# EAGLE board marionette_v1.0 (EAGLE 7.1.0), part 1 of 3
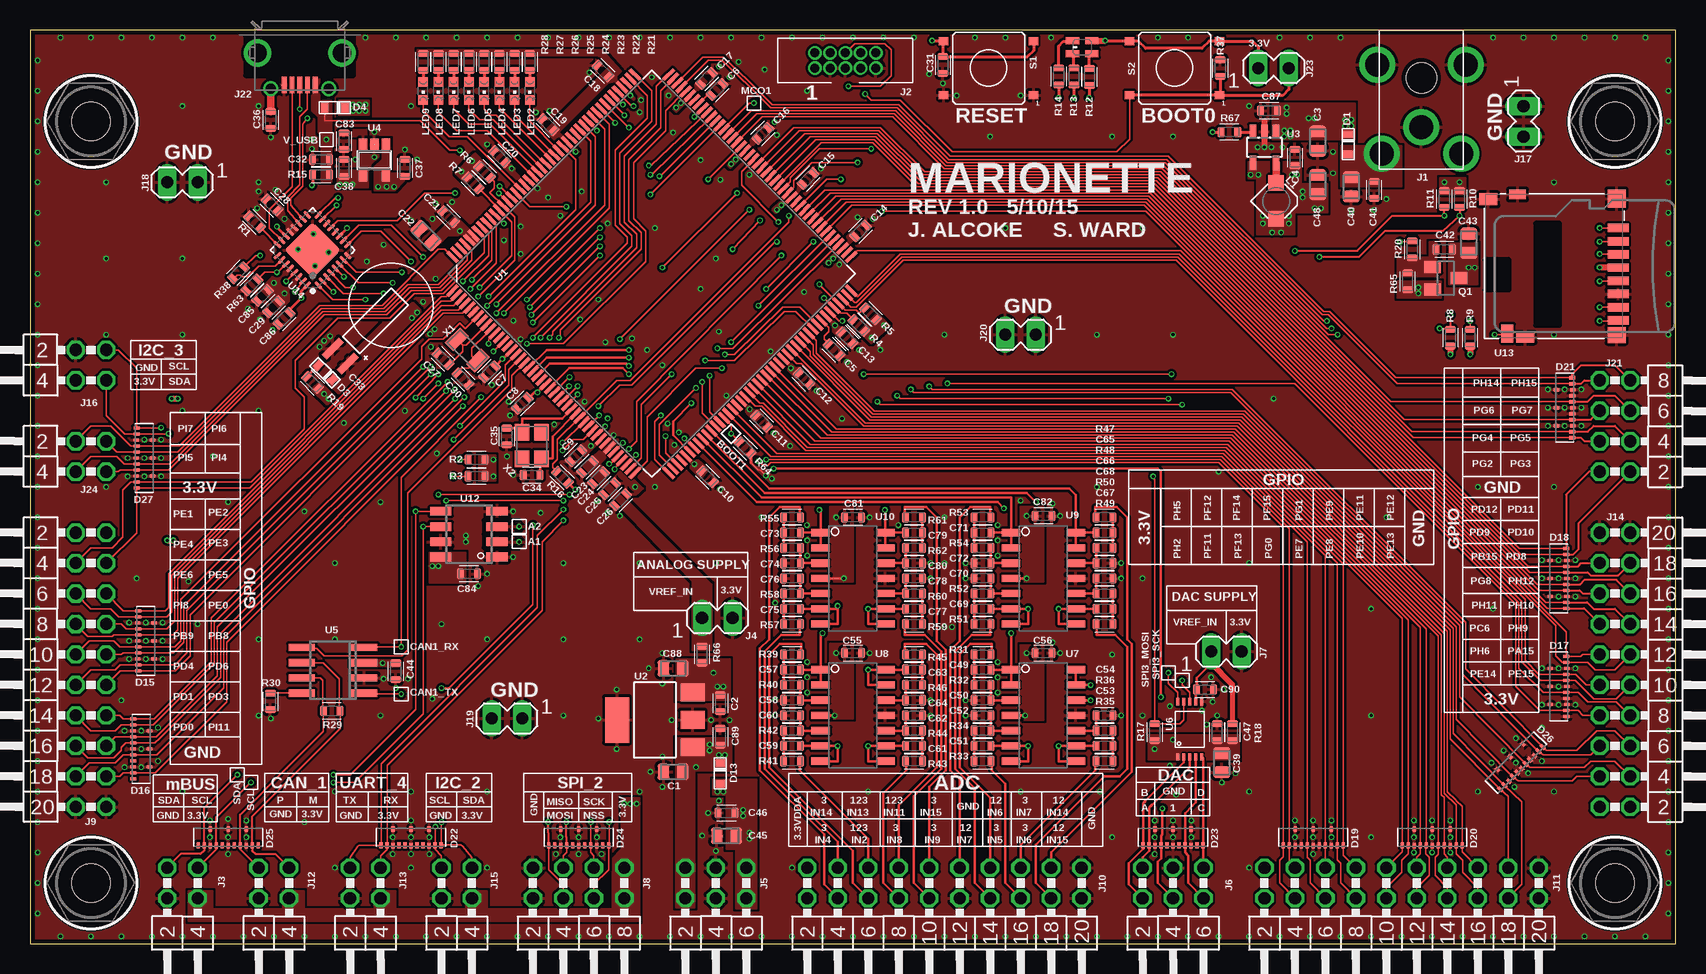
[diagram p0: board, top side]
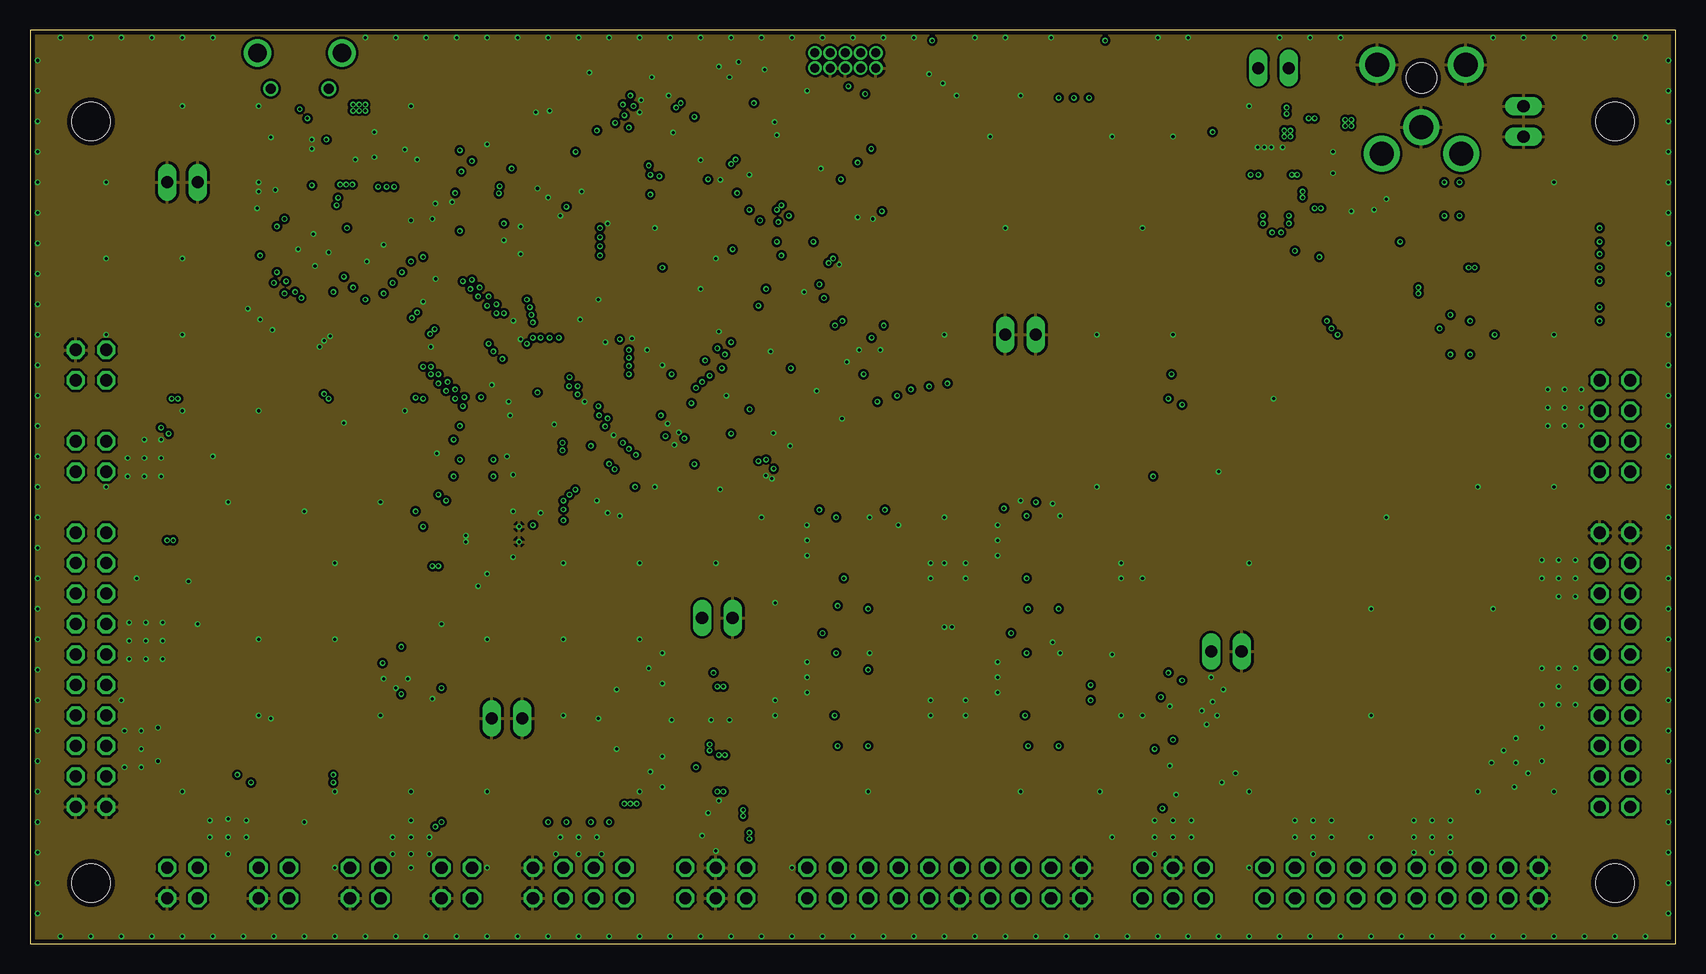
[diagram p1: board, inner layer Route2]
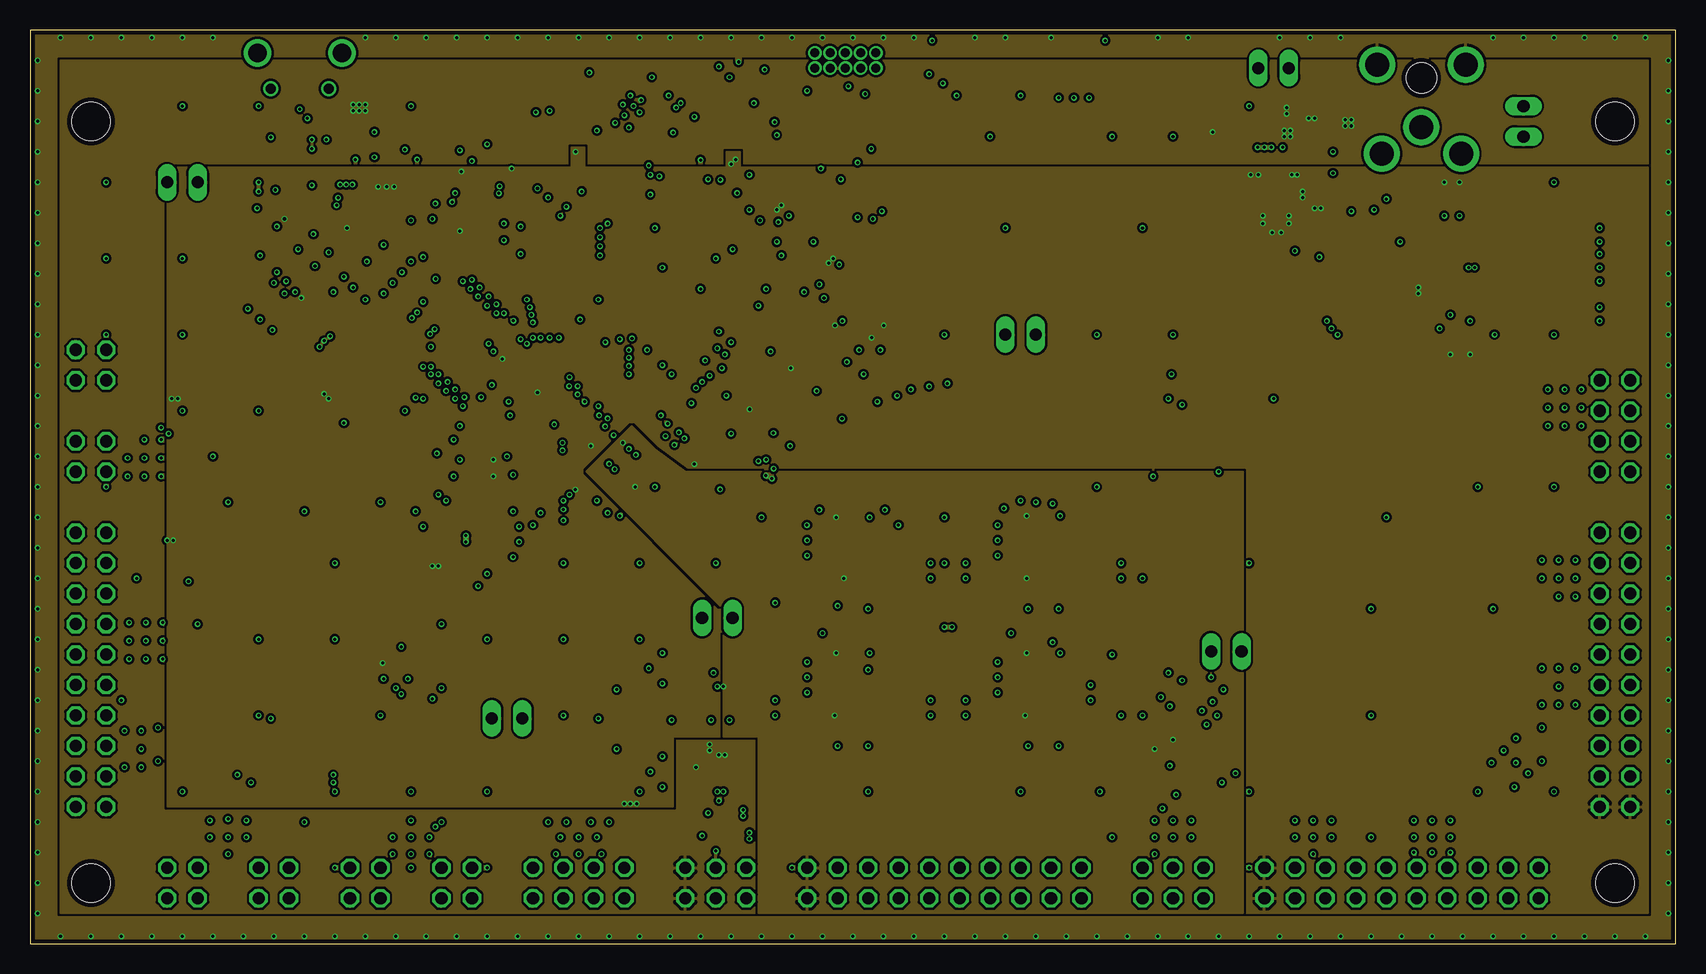
[diagram p2: board, inner layer Route15]
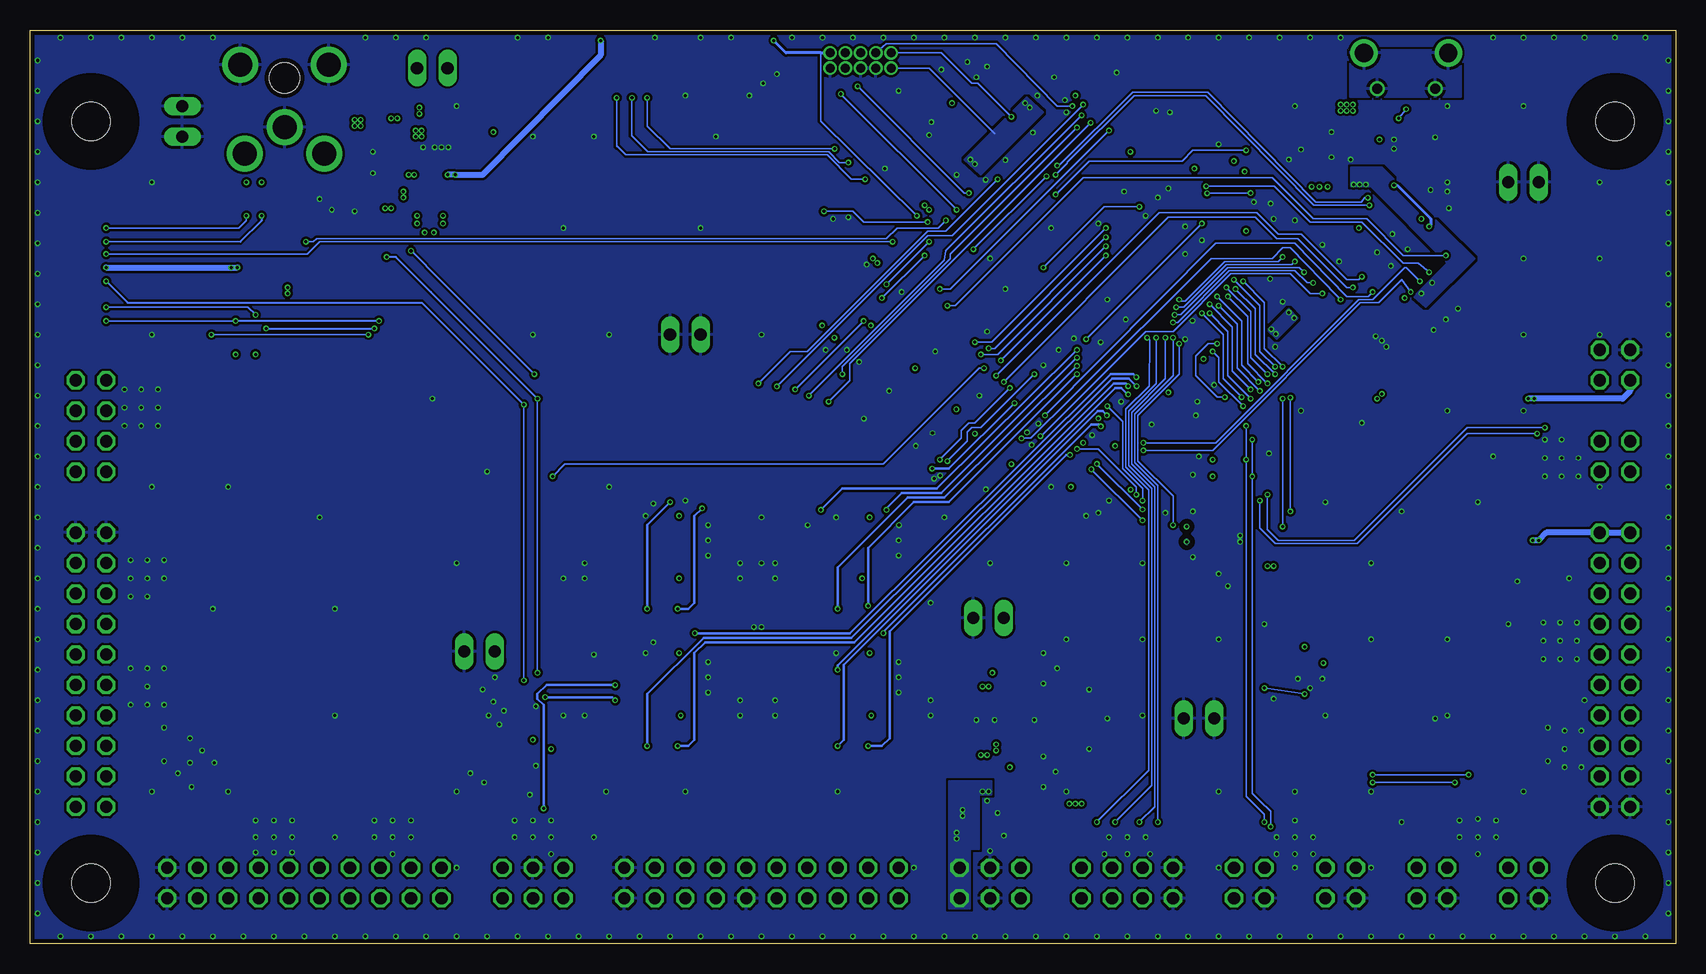
[diagram p3: board, bottom side, seen from below]

Size 137.16 x 76.2 mm. Coordinates in mm from the lower left corner, seen from the top.
Outline: 137.16,0 137.16,76.2 0,76.2 0,0 137.16,0
Copper layers (1*2*15*16): Top 0.035559375mm / dielectric 0.17018125mm / Route2 0.01778125mm / dielectric 47mil / Route15 0.01778125mm / dielectric 0.17018125mm / Bottom 0.035559375mm
Design rules "OSHPark-4layer": minimum track width 5mil, minimum drill 10mil, track to track 5mil, track to pad 5mil, pad to pad 5mil, via to via 5mil, smd to smd 5mil, copper to edge 15mil, drill to drill 6mil, minimum pad ring 4mil, minimum via ring 4mil, stop-mask expansion 4mil, vias tented up to drill 0mil, thermal gap 10mil
tRestrict: 6 lines
bRestrict: area 40.4,34.4 to 41.2,35.2; area 40.3,33.1 to 41.2,34

## Footprints (pad centres in the part's own frame; a part is rotated, then mirrored left to right if it is on the bottom)
10MIL-TEST-POINT = drill 0.254: P$1 0,0
.0805-C-NOSILK = smd 0.95 x 1.35: 1 -0.8,0; 2 0.8,0
.0603-C = smd 0.6 x 0.9: 1 -0.7,0; 2 0.7,0
SCAP = smd 0.6 x 2: N -0.9,0; P 0.9,0
SOD-523F = smd 0.6 x 0.8: P$1 -0.85,0; P$2 0.85,0
UFDFN-14 = smd 0.26 x 0.43: GND@1 -1.5,-0.685; GND@2 0,-0.685; GND@3 1.5,-0.685; GND@4 -1.5,0.685; GND@5 0,0.685; GND@6 1.5,0.685 | smd 0.26 x 0.5: P1 -2.5,-0.65; P2 -2,-0.65; P3 -1,-0.65; P4 -0.5,-0.65; P5 0.5,-0.65; P6 1,-0.65; P7 2,-0.65; P8 2.5,-0.65
MALE_JACK = drill 2 pad 2.54: 1 10.3,-3.3; 2 8.1,0; 3 10.3,3.3; P$1 2.9,3.7; P$2 2.9,-3.7 | hole 2.5: 4,0
2X10_BOXHEADER = drill 0.75 pad 0.813: 1 -2.54,-0.635; 2 -2.54,0.635; 3 -1.27,-0.635; 4 -1.27,0.635; 5 0,-0.635; 6 0,0.625; 7 1.27,-0.635; 8 1.27,0.635; 9 2.54,-0.635; 10 2.54,0.635
MA02-2W = drill 1.016 octagon: 1 -1.27,-1.27; 2 -1.27,1.27; 3 1.27,-1.27; 4 1.27,1.27
MA02-1 = drill 1.016 long: 1 -1.27,0; 2 1.27,0
MA03-2W = drill 1.016 octagon: 1 -2.54,-1.27; 2 -2.54,1.27; 3 0,-1.27; 4 0,1.27; 5 2.54,-1.27; 6 2.54,1.27
MA04-2W = drill 1.016 octagon: 1 -3.81,-1.27; 2 -3.81,1.27; 3 -1.27,-1.27; 4 -1.27,1.27; 5 1.27,-1.27; 6 1.27,1.27; 7 3.81,-1.27; 8 3.81,1.27
MA10-2W = drill 1.016 octagon: 1 -11.43,-1.27; 2 -11.43,1.27; 3 -8.89,-1.27; 4 -8.89,1.27; 5 -6.35,-1.27; 6 -6.35,1.27; 7 -3.81,-1.27; 8 -3.81,1.27; 9 -1.27,-1.27; 10 -1.27,1.27; 11 1.27,-1.27; 12 1.27,1.27; 13 3.81,-1.27; 14 3.81,1.27; 15 6.35,-1.27; 16 6.35,1.27; 17 8.89,-1.27; 18 8.89,1.27; 19 11.43,-1.27; 20 11.43,1.27
ZX62D-B-5P8 = smd 0.4 x 1.35: P1 -1.3,2.675; P2 -0.65,2.675; P3 0,2.675; P4 0.65,2.675; P5 1.3,2.675 | drill 1.524: P$1 3.51,0; P$2 -3.51,0 | drill 0.838: P$3 -2.425,3; P$4 2.425,3
CDRH2D14 = smd 1.3 x 1.3 rotated 45: 1 -1.06,1.06; 2 1.06,-1.06
KINGBRITE_RGBLED_1.6X1.26 = smd 1.1 x 0.6: 1 0.8,-0.55; 2 -0.8,-0.55; 3 -0.8,0.55; 4 0.8,0.55
CHIPLED_0603 = smd 0.8 x 0.8: A 0,-0.75; C 0,0.75
SOT23 = smd 1 x 1.4: 1 -0.95,-1.1; 2 0.95,-1.1; 3 0,1.1
SMT = smd 0.775 x 0.65: 1 -3.75,2.25; 2 3.75,2.25; 3 -3.75,-2.25; 4 3.75,-2.25
LQFP176 = smd 1.2 x 0.3: 1 -12.75,10.75; 2 -12.75,10.25; 3 -12.75,9.75; 4 -12.75,9.25; 5 -12.75,8.75; 6 -12.75,8.25; 7 -12.75,7.75; 8 -12.75,7.25; 9 -12.75,6.75; 10 -12.75,6.25; 11 -12.75,5.75; 12 -12.75,5.25; 13 -12.75,4.75; 14 -12.75,4.25; 15 -12.75,3.75; 16 -12.75,3.25; 17 -12.75,2.75; 18 -12.75,2.25; 19 -12.75,1.75; 20 -12.75,1.25; 21 -12.75,0.75; 22 -12.75,0.25; 23 -12.75,-0.25; 24 -12.75,-0.75; 25 -12.75,-1.25; 26 -12.75,-1.75; 27 -12.75,-2.25; 28 -12.75,-2.75; 29 -12.75,-3.25; 30 -12.75,-3.75; 31 -12.75,-4.25; 32 -12.75,-4.75; 33 -12.75,-5.25; 34 -12.75,-5.75; 35 -12.75,-6.25; 36 -12.75,-6.75; 37 -12.75,-7.25; 38 -12.75,-7.75; 39 -12.75,-8.25; 40 -12.75,-8.75; 41 -12.75,-9.25; 42 -12.75,-9.75; 43 -12.75,-10.25; 44 -12.75,-10.75; 89 12.75,-10.75; 90 12.75,-10.25; 91 12.75,-9.75; 92 12.75,-9.25; 93 12.75,-8.75; 94 12.75,-8.25; 95 12.75,-7.75; 96 12.75,-7.25; 97 12.75,-6.75; 98 12.75,-6.25; 99 12.75,-5.75; 100 12.75,-5.25; 101 12.75,-4.75; 102 12.75,-4.25; 103 12.75,-3.75; 104 12.75,-3.25; 105 12.75,-2.75; 106 12.75,-2.25; 107 12.75,-1.75; 108 12.75,-1.25; 109 12.75,-0.75; 110 12.75,-0.25; 111 12.75,0.25; 112 12.75,0.75; 113 12.75,1.25; 114 12.75,1.75; 115 12.75,2.25; 116 12.75,2.75; 117 12.75,3.25; 118 12.75,3.75; 119 12.75,4.25; 120 12.75,4.75; 121 12.75,5.25; 122 12.75,5.75; 123 12.75,6.25; 124 12.75,6.75; 125 12.75,7.25; 126 12.75,7.75; 127 12.75,8.25; 128 12.75,8.75; 129 12.75,9.25; 130 12.75,9.75; 131 12.75,10.25; 132 12.75,10.75 | smd 0.3 x 1.2: 45 -10.75,-12.75; 46 -10.25,-12.75; 47 -9.75,-12.75; 48 -9.25,-12.75; 49 -8.75,-12.75; 50 -8.25,-12.75; 51 -7.75,-12.75; 52 -7.25,-12.75; 53 -6.75,-12.75; 54 -6.25,-12.75; 55 -5.75,-12.75; 56 -5.25,-12.75; 57 -4.75,-12.75; 58 -4.25,-12.75; 59 -3.75,-12.75; 60 -3.25,-12.75; 61 -2.75,-12.75; 62 -2.25,-12.75; 63 -1.75,-12.75; 64 -1.25,-12.75; 65 -0.75,-12.75; 66 -0.25,-12.75; 67 0.25,-12.75; 68 0.75,-12.75; 69 1.25,-12.75; 70 1.75,-12.75; 71 2.25,-12.75; 72 2.75,-12.75; 73 3.25,-12.75; 74 3.75,-12.75; 75 4.25,-12.75; 76 4.75,-12.75; 77 5.25,-12.75; 78 5.75,-12.75; 79 6.25,-12.75; 80 6.75,-12.75; 81 7.25,-12.75; 82 7.75,-12.75; 83 8.25,-12.75; 84 8.75,-12.75; 85 9.25,-12.75; 86 9.75,-12.75; 87 10.25,-12.75; 88 10.75,-12.75; 133 10.75,12.75; 134 10.25,12.75; 135 9.75,12.75; 136 9.25,12.75; 137 8.75,12.75; 138 8.25,12.75; 139 7.75,12.75; 140 7.25,12.75; 141 6.75,12.75; 142 6.25,12.75; 143 5.75,12.75; 144 5.25,12.75; 145 4.75,12.75; 146 4.25,12.75; 147 3.75,12.75; 148 3.25,12.75; 149 2.75,12.75; 150 2.25,12.75; 151 1.75,12.75; 152 1.25,12.75; 153 0.75,12.75; 154 0.25,12.75; 155 -0.25,12.75; 156 -0.75,12.75; 157 -1.25,12.75; 158 -1.75,12.75; 159 -2.25,12.75; 160 -2.75,12.75; 161 -3.25,12.75; 162 -3.75,12.75; 163 -4.25,12.75; 164 -4.75,12.75; 165 -5.25,12.75; 166 -5.75,12.75; 167 -6.25,12.75; 168 -6.75,12.75; 169 -7.25,12.75; 170 -7.75,12.75; 171 -8.25,12.75; 172 -8.75,12.75; 173 -9.25,12.75; 174 -9.75,12.75; 175 -10.25,12.75; 176 -10.75,12.75
SOT223 = smd 1.499 x 2.007: 1 -2.261,-3.15; 2 0.025,-3.15; 3 2.311,-3.15 | smd 3.81 x 2.007: 4 0,3.15
SOT23-5L = smd 0.55 x 1.2: 1 -0.95,-1.3; 2 0,-1.3; 3 0.95,-1.3; 4 0.95,1.3; 5 -0.95,1.3
SOT23-5 = smd 0.69 x 0.99: 1 -0.95,-1.29; 2 0,-1.29; 3 0.95,-1.29; 4 0.95,1.3; 5 -0.95,1.3
SO8 = smd 0.6 x 2.2: 1 -1.905,-2.6; 2 -0.635,-2.6; 3 0.635,-2.6; 4 1.905,-2.6; 5 1.905,2.6; 6 0.635,2.6; 7 -0.635,2.6; 8 -1.905,2.6
10-TFSOP = smd 0.25 x 0.6: 1 -1,-2.3; 2 -0.5,-2.3; 3 0,-2.3; 4 0.5,-2.3; 5 1,-2.3; 6 1,2.3; 7 0.5,2.3; 8 0,2.3; 9 -0.5,2.3; 10 -1,2.3
SOIC-14 = smd 0.6 x 1.55: 1 -3.81,-2.7; 2 -2.54,-2.7; 3 -1.27,-2.7; 4 0,-2.7; 5 1.27,-2.7; 6 2.54,-2.7; 7 3.81,-2.7; 8 3.81,2.7; 9 2.54,2.7; 10 1.27,2.7; 11 0,2.7; 12 -1.27,2.7; 13 -2.54,2.7; 14 -3.81,2.7
SO08 = smd 0.72 x 1.78: 1 -1.905,-2.35; 2 -0.635,-2.35; 3 0.635,-2.35; 4 1.905,-2.35; 5 1.905,2.35; 6 0.635,2.35; 7 -0.635,2.35; 8 -1.905,2.35
HIROSE_DM3D(MICRO-SD) = smd 1.5 x 1.5: G1 -7.782,10.035 | smd 1.3 x 1.5: G2 3.593,10.035 | smd 0.8 x 1.5: G3 3.818,2.435 | smd 0.8 x 1.4: G4 -8.132,1.785 | smd 0.7 x 1.75: P1 -5.332,10.16; P2 -4.232,10.16; P3 -3.132,10.16; P4 -2.032,10.16; P5 -0.932,10.16; P6 0.168,10.16; P7 1.268,10.16; P8 2.368,10.16 | smd 1.5 x 1: S0 3.468,0.935 | smd 1 x 1.5: S1 -7.732,-0.64
QFN32-5X5 = smd 0.78 x 0.28: 1 -2.4,1.75; 2 -2.4,1.25; 3 -2.4,0.75; 4 -2.4,0.25; 5 -2.4,-0.25; 6 -2.4,-0.75; 7 -2.4,-1.25; 8 -2.4,-1.75; 17 2.4,-1.75; 18 2.4,-1.25; 19 2.4,-0.75; 20 2.4,-0.25; 21 2.4,0.25; 22 2.4,0.75; 23 2.4,1.25; 24 2.4,1.75 | smd 0.28 x 0.78: 9 -1.75,-2.4; 10 -1.25,-2.4; 11 -0.75,-2.4; 12 -0.25,-2.4; 13 0.25,-2.4; 14 0.75,-2.4; 15 1.25,-2.4; 16 1.75,-2.4; 25 1.75,2.4; 26 1.25,2.4; 27 0.75,2.4; 28 0.25,2.4; 29 -0.25,2.4; 30 -0.75,2.4; 31 -1.25,2.4; 32 -1.75,2.4 | smd 3.3 x 3.3: PAD 0,0
#4/.300-BARE+STD_NUT_OR_STAR_WASHER = hole 3.175: 0,0
2-SMD_ABM7 = smd 1 x 1.8: P$1 -1.25,0; P$2 1.25,0
DFN4SMD = smd 1.4 x 1.2: P1 -1.1,0.8; P2 1.1,0.8; P3 -1.1,-0.8; P4 1.1,-0.8

## Placement (x,y rotation side)
A1  TEST-POINT10MIL-TEST-POINT  [10MIL-TEST-POINT]  40.77,33.53 0 top
A2  TEST-POINT10MIL-TEST-POINT  [10MIL-TEST-POINT]  40.77,34.8 0 top
BOOT1  TEST-POINT10MIL-TEST-POINT  [10MIL-TEST-POINT]  58.42,42.55 45 top
C1  4.7u  [.0805-C-NOSILK]  53.59,14.35 180 top
C2  100n  [.0603-C]  57.53,20.07 270 top
C3  4.7u  [.0805-C-NOSILK]  107.31,66.93 270 top
C4  100n  [.0603-C]  105.41,65.56 90 top
C5  2.2u  [.0603-C]  67,49.53 315 top
C6  2.2u  [.0603-C]  57.26,71.25 45 top
C7  100n  [.0603-C]  38.3,47.7 225 top
C8  100n  [.0603-C]  41.02,45.09 225 top
C9  100n  [.0603-C]  45.52,40.71 225 top
C10  100n  [.0603-C]  56.46,38.94 315 top
C11  100n  [.0603-C]  60.96,43.58 315 top
C12  100n  [.0603-C]  64.52,47.14 315 top
C13  100n  [.0603-C]  68.07,50.55 315 top
C14  100n  [.0603-C]  69.19,59.44 45 top
C15  100n  [.0603-C]  64.82,63.81 45 top
C16  100n  [.0603-C]  61.07,67.56 45 top
C17  100n  [.0603-C]  56.39,72.16 45 top
C18  100n  [.0603-C]  47.73,72.77 135 top
C19  100n  [.0603-C]  43.18,68.3 135 top
C20  100n  [.0603-C]  39.12,65.64 135 top
C21  100n  [.0603-C]  34.87,60.63 135 top
C22  4.7u  [.0805-C-NOSILK]  33,59.05 135 top
C23  1u  [.0603-C]  46.46,39.77 225 top
C24  100n  [.0603-C]  47.37,38.86 225 top
C25  100n  [.0603-C]  48.29,37.95 225 top
C26  100n  [.0603-C]  49.2,37.03 225 top
C27  11p  [.0603-C]  34.42,48.77 135 top
C28  2.2u  [.0603-C]  20.16,61.63 135 top
C29  100n  [.0603-C]  20.29,53.11 225 top
C30  11p  [.0603-C]  36.07,47.12 135 top
C31  100n  [.0603-C]  76.07,73.28 270 top
C32  1u  [.0603-C]  24.26,65.41 180 top
C33  220m  [SCAP]  25.85,49.01 315 top
C34  4.4p  [.0603-C]  41.81,39.09 180 top
C35  4.4p  [.0603-C]  39.73,42.32 270 top
C36  100n 50V  [.0603-C]  20.07,68.71 270 top
C37  1u  [.0603-C]  31.24,64.69 90 top
C38  2.2u  [.0603-C]  26.16,64.71 90 top
C39  10u  [.0805-C-NOSILK]  99.31,15.11 270 top
C40  10u  [.0805-C-NOSILK]  110.11,63.12 270 top
C41  100n  [.0603-C]  112.01,62.87 270 top
C42  100p  [.0603-C]  117.86,57.91 180 top
C43  10u  [.0805-C-NOSILK]  119.89,58.42 90 top
C44  100n  [.0603-C]  30.48,22.73 90 top
C45  10u  [.0805-C-NOSILK]  58.04,9.02 180 top
C46  100n  [.0603-C]  58.04,10.92 180 top
C47  100n  [.0603-C]  98.93,17.65 90 top
C48  10u  [.0805-C-NOSILK]  107.31,63.31 90 top
C49  1n  [.0603-C]  79.38,22.86 180 top
C50  1n  [.0603-C]  79.38,20.32 180 top
C51  1n  [.0603-C]  79.38,16.51 180 top
C52  1n  [.0603-C]  79.38,19.05 180 top
C53  1n  [.0603-C]  89.53,16.51 0 top
C54  1n  [.0603-C]  89.53,19.05 0 top
C55  1u  [.0603-C]  68.58,24.26 0 top
C56  1u  [.0603-C]  84.45,24.26 0 top
C57  1n  [.0603-C]  63.5,22.86 180 top
C58  1n  [.0603-C]  63.5,20.32 180 top
C59  1n  [.0603-C]  63.5,16.51 180 top
C60  1n  [.0603-C]  63.5,19.05 180 top
C61  1n  [.0603-C]  73.66,16.51 0 top
C62  1n  [.0603-C]  73.66,19.05 0 top
C63  1n  [.0603-C]  73.66,22.86 0 top
C64  1n  [.0603-C]  73.66,20.32 0 top
C65  1n  [.0603-C]  89.53,34.29 0 top
C66  1n  [.0603-C]  89.53,31.75 0 top
C67  1n  [.0603-C]  89.53,27.94 0 top
C68  1n  [.0603-C]  89.53,30.48 0 top
C69  1n  [.0603-C]  79.38,27.94 180 top
C70  1n  [.0603-C]  79.38,30.48 180 top
C71  1n  [.0603-C]  79.38,34.29 180 top
C72  1n  [.0603-C]  79.38,31.75 180 top
C73  1n  [.0603-C]  63.5,34.29 180 top
C74  1n  [.0603-C]  63.5,31.75 180 top
C75  1n  [.0603-C]  63.5,27.94 180 top
C76  1n  [.0603-C]  63.5,30.48 180 top
C77  1n  [.0603-C]  73.66,27.94 0 top
C78  1n  [.0603-C]  73.66,30.48 0 top
C79  1n  [.0603-C]  73.66,34.29 0 top
C80  1n  [.0603-C]  73.66,31.75 0 top
C81  1u  [.0603-C]  68.58,35.56 0 top
C82  1u  [.0603-C]  84.45,35.69 0 top
C83  100n  [.0603-C]  26.16,66.93 270 top
C84  100n  [.0603-C]  36.58,30.86 0 top
C85  100n  [.0603-C]  19.39,54.06 225 top
C86  100n  [.0603-C]  21.17,52.16 225 top
C87  100n  [.0603-C]  103.25,69.47 180 top
C88  4.7u  [.0805-C-NOSILK]  53.59,22.99 180 top
C89  100n  [.0603-C]  57.53,17.27 90 top
C90  100n  [.0603-C]  97.92,21.21 0 top
CAN1_RX  TEST-POINT10MIL-TEST-POINT  [10MIL-TEST-POINT]  30.94,24.77 270 top
CAN1_TX  TEST-POINT10MIL-TEST-POINT  [10MIL-TEST-POINT]  30.94,20.83 90 top
D1  CDBU0530  [SOD-523F]  109.86,66.67 90 top
D3  CDBU0530  [SOD-523F]  24.6,47.63 315 top
D4  CDBU0530  [SOD-523F]  25.4,69.72 0 top
D13  CDBU0530  [SOD-523F]  57.53,14.22 90 top
D15  ESD8008  [UFDFN-14]  9.65,25.27 270 top
D16  ESD8008  [UFDFN-14]  9.27,16.26 270 top
D17  ESD8008  [UFDFN-14]  127.38,21.46 90 top
D18  ESD8008  [UFDFN-14]  127.38,30.48 90 top
D19  ESD8008  [UFDFN-14]  106.93,8.89 0 top
D20  ESD8008  [UFDFN-14]  116.84,8.89 0 top
D21  ESD8008  [UFDFN-14]  127.89,44.7 90 top
D22  ESD8008  [UFDFN-14]  31.75,8.89 0 top
D23  ESD8008  [UFDFN-14]  95.25,8.89 0 top
D24  ESD8008  [UFDFN-14]  45.72,8.89 0 top
D25  ESD8008  [UFDFN-14]  16.51,8.89 0 top
D26  ESD8008  [UFDFN-14]  123.83,15.11 45 top
D27  ESD8008  [UFDFN-14]  9.53,40.51 270 top
J1  [MALE_JACK]  115.95,76.2 270 top
J2  SWD  [2X10_BOXHEADER]  67.94,73.66 0 top
J3  [MA02-2W]  12.7,5.08 0 top
J4  MA02-1  [MA02-1]  57.28,27.18 0 top
J5  MA03-2W  [MA03-2W]  57.15,5.08 0 top
J6  MA03-2W  [MA03-2W]  95.25,5.08 0 top
J7  MA02-1  [MA02-1]  99.69,24.38 0 top
J8  MA04-2W  [MA04-2W]  45.72,5.08 0 top
J9  [MA10-2W]  5.08,22.86 270 top
J10  [MA10-2W]  76.2,5.08 0 top
J11  [MA10-2W]  114.3,5.08 0 top
J12  [MA02-2W]  20.32,5.08 0 top
J13  [MA02-2W]  27.94,5.08 0 top
J14  [MA10-2W]  132.08,22.86 90 top
J15  [MA02-2W]  35.56,5.08 0 top
J16  [MA02-2W]  5.08,48.26 270 top
J17  MA02-1  [MA02-1]  124.46,68.58 270 top
J18  MA02-1  [MA02-1]  12.7,63.5 180 top
J19  MA02-1  [MA02-1]  39.75,18.8 180 top
J20  MA02-1  [MA02-1]  82.55,50.8 180 top
J21  MA04-2W  [MA04-2W]  132.08,43.18 90 top
J22  ZX62D-B-5P8  [ZX62D-B-5P8]  22.48,74.3 180 top
J23  MA02-1  [MA02-1]  103.63,73.03 0 top
J24  [MA02-2W]  5.08,40.64 270 top
L1  2.2uH  [CDRH2D14]  103.85,61.94 315 top
LED1  RGB  [KINGBRITE_RGBLED_1.6X1.26]  87.68,74.76 180 top
LED2  LS_Q976  [CHIPLED_0603]  41.66,71.12 180 top
LED3  LS_Q976  [CHIPLED_0603]  40.39,71.12 180 top
LED4  LS_Q976  [CHIPLED_0603]  39.12,71.12 180 top
LED5  LS_Q976  [CHIPLED_0603]  37.85,71.12 180 top
LED6  LS_Q976  [CHIPLED_0603]  36.58,71.12 180 top
LED7  LS_Q976  [CHIPLED_0603]  35.31,71.12 180 top
LED8  LS_Q976  [CHIPLED_0603]  34.04,71.12 180 top
LED9  LS_Q976  [CHIPLED_0603]  32.77,71.12 180 top
MCO1  TEST-POINT10MIL-TEST-POINT  [10MIL-TEST-POINT]  60.33,70.1 0 top
Q1  BSS84  [SOT23]  117.98,55.5 270 top
R1  8.06k  [.0603-C]  18.71,60.21 135 top
R2  4.7k  [.0603-C]  37.21,40.39 0 top
R3  4.7k  [.0603-C]  37.21,38.99 0 top
R4  4.7k  [.0603-C]  69.09,51.56 315 top
R5  4.7k  [.0603-C]  70.05,52.53 315 top
R6  4.7k  [.0603-C]  37.87,64.37 135 top
R7  4.7k  [.0603-C]  36.93,63.45 135 top
R8  4.7k  [.0603-C]  118.36,50.55 270 top
R9  4.7k  [.0603-C]  120.02,50.55 270 top
R10  4.7k  [.0603-C]  119.13,62.1 90 top
R11  4.7k  [.0603-C]  117.86,62.1 90 top
R12  649  [.0603-C]  88.29,72.28 90 top
R13  51  [.0603-C]  87,72.33 90 top
R14  51  [.0603-C]  85.72,72.33 90 top
R15  10k  [.0603-C]  24.26,64.14 180 top
R16  10k  [.0603-C]  44.36,38.91 315 top
R17  10k  [.0603-C]  93.73,17.65 270 top
R18  0  [.0603-C]  100.2,17.65 90 top
R19  1k  [.0603-C]  23.54,46.81 315 top
R20  10k  [.0603-C]  115.19,57.91 90 top
R21  649  [.0603-C]  41.66,73.53 90 top
R22  649  [.0603-C]  40.39,73.53 90 top
R23  649  [.0603-C]  39.12,73.53 90 top
R24  649  [.0603-C]  37.85,73.53 90 top
R25  649  [.0603-C]  36.58,73.53 90 top
R26  649  [.0603-C]  35.31,73.53 90 top
R27  649  [.0603-C]  34.04,73.53 90 top
R28  649  [.0603-C]  32.77,73.53 90 top
R29  120  [.0603-C]  25.15,19.43 180 top
R30  0  [.0603-C]  20.04,20.22 90 top
R31  7.5k  [.0603-C]  79.38,24.13 180 top
R32  7.5k  [.0603-C]  79.38,21.59 0 top
R33  7.5k  [.0603-C]  79.38,15.24 180 top
R34  7.5k  [.0603-C]  79.38,17.78 0 top
R35  7.5k  [.0603-C]  89.53,15.24 0 top
R36  7.5k  [.0603-C]  89.53,17.78 180 top
R37  10k  [.0603-C]  99.19,73.03 270 top
R38  0  [.0603-C]  17.36,55.97 45 top
R39  7.5k  [.0603-C]  63.5,24.13 180 top
R40  7.5k  [.0603-C]  63.5,21.59 0 top
R41  7.5k  [.0603-C]  63.5,15.24 180 top
R42  7.5k  [.0603-C]  63.5,17.78 0 top
R43  7.5k  [.0603-C]  73.66,15.24 0 top
R44  7.5k  [.0603-C]  73.66,17.78 180 top
R45  7.5k  [.0603-C]  73.66,24.13 0 top
R46  7.5k  [.0603-C]  73.66,21.59 180 top
R47  7.5k  [.0603-C]  89.53,35.56 0 top
R48  7.5k  [.0603-C]  89.53,33.02 180 top
R49  7.5k  [.0603-C]  89.53,26.67 0 top
R50  7.5k  [.0603-C]  89.53,29.21 180 top
R51  7.5k  [.0603-C]  79.38,26.67 180 top
R52  7.5k  [.0603-C]  79.38,29.21 0 top
R53  7.5k  [.0603-C]  79.38,35.56 180 top
R54  7.5k  [.0603-C]  79.38,33.02 0 top
R55  7.5k  [.0603-C]  63.5,35.56 180 top
R56  7.5k  [.0603-C]  63.5,33.02 0 top
R57  7.5k  [.0603-C]  63.5,26.67 180 top
R58  7.5k  [.0603-C]  63.5,29.21 0 top
R59  7.5k  [.0603-C]  73.66,26.67 0 top
R60  7.5k  [.0603-C]  73.66,29.21 180 top
R61  7.5k  [.0603-C]  73.66,35.56 0 top
R62  7.5k  [.0603-C]  73.66,33.02 180 top
R63  10k  [.0603-C]  18.49,54.94 225 top
R64  10k  [.0603-C]  59.6,41.36 135 top
R65  100k  [.0603-C]  114.81,55.24 90 top
R66  0  [.0603-C]  56.01,24.13 270 top
R67  10k  [.0603-C]  99.95,67.69 0 top
S1  PTS645  [SMT]  79.88,73.03 180 top
S2  PTS645  [SMT]  95.38,73.03 180 top
SCL  TEST-POINT10MIL-TEST-POINT  [10MIL-TEST-POINT]  18.41,13.46 0 top
SDA  TEST-POINT10MIL-TEST-POINT  [10MIL-TEST-POINT]  17.27,14.1 0 top
SPI3_MOSI  TEST-POINT10MIL-TEST-POINT  [10MIL-TEST-POINT]  96.01,21.97 270 top
SPI3_SCK  TEST-POINT10MIL-TEST-POINT  [10MIL-TEST-POINT]  94.87,22.61 90 top
U1  STM32F407  [LQFP176]  51.82,55.88 45 top
U2  TC1262  [SOT223]  52.07,18.67 90 top
U3  LM3671  [SOT23-5L]  102.87,66.42 180 top
U4  LK112  [SOT23-5]  28.7,65.34 180 top
U5  MAX3051ESAESA+  [SO8]  25.25,22.81 90 top
U6  DAC124S085CIMM  [10-TFSOP]  96.65,17.91 0 top
U7  LVM344  [SOIC-14]  84.45,19.05 270 top
U8  LVM344  [SOIC-14]  68.58,19.05 270 top
U9  LVM344  [SOIC-14]  84.45,30.48 270 top
U10  LVM344  [SOIC-14]  68.58,30.48 270 top
U12  AT24C04D  [SO08]  36.58,34.16 90 top
U13  CON_HIROSE_DM3D(MICROSD)  [HIROSE_DM3D(MICRO-SD)]  122.17,54.36 270 top
U14  USB3320  [QFN32-5X5]  23.55,57.85 135 top
U$33  #4-BARE_MOUNTING_HOLE/.300  [#4/.300-BARE+STD_NUT_OR_STAR_WASHER]  132.08,5.08 0 top
U$34  #4-BARE_MOUNTING_HOLE/.300  [#4/.300-BARE+STD_NUT_OR_STAR_WASHER]  132.08,68.58 0 top
U$35  #4-BARE_MOUNTING_HOLE/.300  [#4/.300-BARE+STD_NUT_OR_STAR_WASHER]  5.08,5.08 0 top
U$36  #4-BARE_MOUNTING_HOLE/.300  [#4/.300-BARE+STD_NUT_OR_STAR_WASHER]  5.08,68.58 0 top
V_USB  TEST-POINT10MIL-TEST-POINT  [10MIL-TEST-POINT]  24.7,67.06 0 top
X1  ABSO7  [2-SMD_ABM7]  36.45,49.53 315 top
X2  NX3225SA  [DFN4SMD]  41.81,41.55 270 top

## Library data of the parts
A1 A2 BOOT1 CAN1_RX CAN1_TX MCO1 SCL SDA SPI3_MOSI SPI3_SCK V_USB = Tova
C1-C32 C34-C90 L1 R1-R67 = rcl_custom
C33 = DCK3R3
D1 D3 D4 D13 = CBDU0530
D15-D27 = ESD8008MUT
J1 = PJ_047A
J2 = SWD_CONNECTOR
J3-J21 J23 J24 = MA_HEADER
J22 = con-hirose-microusb
LED1 = led-rgb-rohm
LED2-LED9 = LS_Q976_NR_1
Q1 = BSS84
S1 S2 = PTS645
U1 = STM32F407; PA0: UART4_TX; PA1: UART4_RX; PA10: SDIO-PWR; PA11: OTG_FS_DM; PA12: OTG_FS_DP; PA13: SWDIO; PA14: SWCLK; PA15: GPIO; PA2: ADC1/2/3_IN2; PA3: ULPI_D0; PA4: DAC1; PA5: ULPI_CK; PA6: ADC1/2_IN6; PA7: ADC1/2_IN7; PA8: MCO1; PA9: OTG_VBUS; PB0: ULPI_D1; PB1: ULPI_D2; PB10: UPLI_D3; PB11: ULPI_D4; PB12: ULPI_D5; PB13: ULPI_D6; PB14: GPIO; PB15: GPIO; PB2: BOOT1; PB3: SWO; PB4: GPIO; PB5: ULPI_D7; PB6: I2C1_SCL; PB7: I2C1_SDA; PB8: GPIO; PB9: GPIO; PC0: ULPI_STP; PC1: ADC1/2/3_IN11; PC10: SDIO_02; PC11: SDIO_D3; PC12: SDIO_CK; PC13: GPIO; PC14: OSC32_IN; PC15: OSC32_OUT; PC2: ULPI_DIR; PC3: ADC1/2/3_IN13; PC4: ADC1/2_IN14; PC5: ADC1/2_IN15; PC6: GPIO; PC7: SD_DETECT; PC8: SDIO_D0; PC9: SDIO_D1; PD10: GPIO; PD11: GPIO; PD12: GPIO; PD13: GPIO; PD14: GPIO; PD15: GPIO; PD2: SDIO_CMD; PD3: GPIO; PD4: GPIO; PD5: GPIO; PD6: USART2_RX; PD7: GPIO; PD8: GPIO; PD9: GPIO; PE0: GPIO; PE1: GPIO; PE10: GPIO; PE11: GPIO; PE12: GPIO; PE13: GPIO; PE14: GPIO; PE15: GPIO; PE2: GPIO; PE3: GPIO; PE4: GPIO; PE5: GPIO; PE6: GPIO; PE7: GPIO; PE8: GPIO; PE9: GPIO; PF0: I2C2_SDA; PF1: I2C2_SCL; PF10: ADC3_IN8; PF11: GPIO; PF12: GPIO; PF13: GPIO; PF14: GPIO; PF15: GPIO; PF2: GPIO; PF3: ADC3_IN9; PF4: ADC3_IN14; PF5: ADC3_IN15; PF6: ADC3_IN4; PF7: ADC3_IN5; PF8: ADC3_IN6; PF9: ADC3_IN7; PG0: GPIO; PG1: GPIO; PG10: GPIO; PG11: GPIO; PG12: GPIO; PG13: GPIO; PG14: GPIO; PG15: GPIO; PG2: GPIO; PG3: GPIO; PG4: GPIO; PG5: GPIO; PG6: GPIO; PG7: GPIO; PG8: GPIO; PG9: GPIO; PH0: OSC_IN; PH1: OSC_OUT; PH10: GPIO; PH11: GPIO; PH12: GPIO; PH13: CAN1_TX; PH14: GPIO; PH15: GPIO; PH2: GPIO; PH3: GPIO; PH4: ULPI_NXT; PH5: GPIO; PH6: GPIO; PH7: I2C3_SCL; PH8: I2C3_SDA; PH9: GPIO; PI0: SPI2_NSS; PI1: SPI2_SCK; PI10: GPIO; PI11: GPIO; PI2: SPI2_MISO; PI3: SPI2_MOSI; PI4: GPIO; PI5: GPIO; PI6: GPIO; PI7: GPIO; PI8: GPIO; PI9: CAN1_RX
U2 = TC1262
U3 = LM3671
U4 = LK112
U5 = MAX3051ESA
U6 = DAC24S085CIMM
U7-U10 = LMV344IDR
U12 = AT24C04D; SIZE: 4-Kbit (512 x 8)
U13 = con-microsd-hirose-dm3
U14 = USB3320; DMDP: DM; DPDM: DP
U$33-U$36 = mount
X1 = ABS07
X2 = NX3225SA

## Nets
3.3VDD: C4.1 C7.1 C8.1 C9.1 C10.1 C11.1 C12.1 C13.1 C14.1 C15.1 C16.1 C17.1 C18.1 C19.1 C20.1 C21.1 C22.1 C28.1 C37.1 C44.2 C48.1 C84.1 C86.1 J2.1 J3.3 J8.7 J8.8 J9.1 J9.2 J11.1 J11.2 J12.3 J13.3 J14.1 J14.2 J15.3 J16.3 J23.1 L1.2 LED1.2 Q1.2 R2.2 R3.2 R4.2 R5.2 R6.2 R7.2 R8.2 R9.2 R10.2 R11.2 R16.2 R19.2 R21.2 R22.2 R23.2 R24.2 R25.2 R26.2 R27.2 R28.2 R65.1 S2.3 S2.4 U1.15 U1.23 U1.36 U1.49 U1.62 U1.72 U1.82 U1.91 U1.103 U1.114 U1.127 U1.136 U1.149 U1.159 U1.171 U1.172 U3.4 U4.1 U4.5 U5.3 U12.8 U14.11 U14.20 U14.21 U14.32
+1.8V: C29.1 C38.1 C85.1 U4.4 U14.28 U14.30
+3.3VDDA: C2.1 C25.1 C26.1 C39.1 C47.1 C55.1 C56.1 C81.1 C82.1 C88.1 J10.1 J10.2 R17.2 R18.1 R66.2 U1.39 U2.3 U6.1 U7.4 U8.4 U9.4 U10.4
ADC1/2/3_CH2: J10.6 R41.1
ADC1/2/3_CH13: J10.5 R39.1
ADC1/2/3_IN2: C59.1 U1.42 U8.6 U8.7
ADC1/2/3_IN11: C61.1 U1.33 U8.8 U8.9
ADC1/2/3_IN13: C57.1 U1.35 U8.1 U8.2
ADC1/2_CH6: J10.13 R51.1
ADC1/2_CH7: J10.12 R53.1
ADC1/2_CH14: J10.17 R49.1
ADC1/2_CH15: J10.18 R47.1
ADC1/2_IN6: C69.1 U1.52 U9.6 U9.7
ADC1/2_IN7: C71.1 U1.53 U9.1 U9.2
ADC1/2_IN14: C67.1 U1.54 U9.8 U9.9
ADC1/2_IN15: C65.1 U1.55 U9.13 U9.14
ADC3_CH4: J10.4 R57.1
ADC3_CH5: J10.14 R31.1
ADC3_CH7: J10.15 R33.1
ADC3_CH8: J10.8 R45.1
ADC3_CH14: J10.3 R55.1
ADC3_CH15: J10.9 R59.1
ADC3_IN4: C75.1 U1.24 U10.6 U10.7
ADC3_IN5: C49.1 U1.25 U7.1 U7.2
ADC3_IN6: C53.1 U1.26 U7.8 U7.9
ADC3_IN7: C51.1 U1.27 U7.6 U7.7
ADC3_IN8: C63.1 U1.28 U8.13 U8.14
ADC3_IN9: C79.1 U1.19 U10.13 U10.14
ADC3_IN14: C73.1 U1.20 U10.1 U10.2
ADC3_IN15: C77.1 U1.21 U10.8 U10.9
ADC_1/2/3_CH11: J10.7 R43.1
ADC_CH6: J10.16 R35.1
ADC_IN9: J10.10 R61.1
BOOT0: J23.2 R37.2 S2.1 S2.2 U1.166
BOOT1: BOOT1.P$1 R64.2 U1.58
CAN1_M: D25.P7 J12.4 R29.1 U5.6
CAN1_P: D25.P6 J12.2 R29.2 U5.7
CAN1_RX: CAN1_RX.P$1 U1.11 U5.4
CAN1_TX: CAN1_TX.P$1 U1.128 U5.1
DAC1: U1.50 U7.12
DAC1_FILT: D23.P3 J6.3 U7.13 U7.14
DAC_A: D23.P1 J6.1 U6.2
DAC_B: D23.P2 J6.2 U6.3
DAC_C: D23.P6 J6.5 U6.4
DAC_D: D23.P8 J6.6 U6.5
FS_N: U1.122 U14.15
FS_P: U1.123 U14.16
GND: A1.P$1 A2.P$1 C1.2 C2.2 C3.2 C4.2 C5.2 C6.2 C7.2 C8.2 C9.2 C10.2 C11.2 C12.2 C13.2 C14.2 C15.2 C16.2 C17.2 C18.2 C19.2 C20.2 C21.2 C22.2 C23.2 C24.2 C25.2 C26.2 C27.2 C28.2 C29.2 C30.1 C31.2 C32.2 C33.N C34.2 C35.2 C36.2 C37.2 C38.2 C39.2 C40.2 C41.2 C43.2 C44.1 C45.2 C46.2 C47.2 C48.2 C50.2 C52.2 C54.2 C55.2 C56.2 C58.2 C60.2 C62.2 C64.2 C66.2 C68.2 C70.2 C72.2 C74.2 C76.2 C78.2 C80.2 C81.2 C82.2 C83.2 C84.2 C85.2 C86.2 C87.2 C88.2 C89.2 C90.2 D15.GND@1 D15.GND@2 D15.GND@3 D15.GND@4 D15.GND@5 D15.GND@6 D16.GND@1 D16.GND@2 D16.GND@3 D16.GND@4 D16.GND@5 D16.GND@6 D17.GND@1 D17.GND@2 D17.GND@3 D17.GND@4 D17.GND@5 D17.GND@6 D17.P1 D17.P3 D18.GND@1 D18.GND@2 D18.GND@3 D18.GND@4 D18.GND@5 D18.GND@6 D19.GND@1 D19.GND@2 D19.GND@3 D19.GND@4 D19.GND@5 D19.GND@6 D19.P3 D19.P5 D20.GND@1 D20.GND@2 D20.GND@3 D20.GND@4 D20.GND@5 D20.GND@6 D21.GND@1 D21.GND@2 D21.GND@3 D21.GND@4 D21.GND@5 D21.GND@6 D21.P4 D21.P6 D22.GND@1 D22.GND@2 D22.GND@3 D22.GND@4 D22.GND@5 D22.GND@6 D23.GND@1 D23.GND@2 D23.GND@3 D23.GND@4 D23.GND@5 D23.GND@6 D24.GND@1 D24.GND@2 D24.GND@3 D24.GND@4 D24.GND@5 D24.GND@6 D25.GND@1 D25.GND@2 D25.GND@3 D25.GND@4 D25.GND@5 D25.GND@6 D26.GND@1 D26.GND@2 D26.GND@3 D26.GND@4 D26.GND@5 D26.GND@6 D26.P4 D26.P6 D27.GND@1 D27.GND@2 D27.GND@3 D27.GND@4 D27.GND@5 D27.GND@6 J1.2 J1.P$1 J1.P$2 J2.3 J2.5 J2.9 J3.1 J4.2 J5.3 J5.4 J6.4 J7.2 J8.1 J8.2 J9.19 J9.20 J10.11 J10.19 J10.20 J11.19 J11.20 J12.1 J13.1 J14.19 J14.20 J15.1 J16.1 J17.1 J17.2 J18.1 J18.2 J19.1 J19.2 J20.1 J20.2 J22.P5 R1.2 R30.1 R37.1 R63.2 R64.1 S1.1 S1.2 U1.14 U1.22 U1.37 U1.48 U1.61 U1.71 U1.90 U1.102 U1.113 U1.126 U1.135 U1.148 U1.158 U2.2 U2.4 U3.2 U4.2 U5.2 U6.6 U7.11 U8.11 U9.11 U10.11 U12.1 U12.2 U12.3 U12.4 U12.7 U13.G1 U13.G2 U13.G3 U13.G4 U13.P6 U13.S1 U14.8 U14.14 U14.PAD
I2C1_SCL: D25.P3 J3.4 R6.1 SCL.P$1 U1.164 U12.6
I2C1_SDA: D25.P2 J3.2 R7.1 SDA.P$1 U1.165 U12.5
I2C2_SCL: D22.P7 J15.2 R3.1 U1.17
I2C2_SDA: D22.P8 J15.4 R2.1 U1.16
I2C3_SCL: D27.P1 J16.2 R4.1 U1.84
I2C3_SDA: D27.P2 J16.4 R5.1 U1.85
MCO1: MCO1.P$1 U1.119
N$1: R67.2 U3.3
N$2: R38.1 U14.26
N$3: L1.1 U3.5
N$5: C83.1 U4.3
N$9: R1.1 U14.24
N$10: R30.2 U5.8
N$11: J22.P4 U14.23
N$12: R15.2 U14.22
N$13: D3.P$1 R19.1
N$14: C6.1 U1.125
N$15: C90.1 J7.1 R18.2 U6.7
N$16: LED1.3 R12.2
N$17: LED1.4 R13.2
N$18: LED1.1 R14.2
N$21: C5.1 U1.81
N$22: C42.2 Q1.1 R20.1 R65.2
N$25: LED2.A R21.1
N$26: LED3.A R22.1
N$27: LED4.A R23.1
N$28: LED5.A R24.1
N$29: LED6.A R25.1
N$30: LED7.A R26.1
N$31: LED8.A R27.1
N$32: LED9.A R28.1
N$33: C49.2 R31.2 R32.1
N$35: C50.1 R32.2 U7.3
N$38: C51.2 R33.2 R34.1
N$40: C52.1 R34.2 U7.5
N$42: C53.2 R35.2 R36.1
N$44: C54.1 R36.2 U7.10
N$50: C57.2 R39.2 R40.1
N$52: C58.1 R40.2 U8.3
N$54: C59.2 R41.2 R42.1
N$56: C60.1 R42.2 U8.5
N$58: C61.2 R43.2 R44.1
N$60: C62.1 R44.2 U8.10
N$62: C63.2 R45.2 R46.1
N$64: C64.1 R46.2 U8.12
N$65: C65.2 R47.2 R48.1
N$67: C66.1 R48.2 U9.12
N$69: C67.2 R49.2 R50.1
N$71: C68.1 R50.2 U9.10
N$73: C69.2 R51.2 R52.1
N$75: C70.1 R52.2 U9.5
N$77: C71.2 R53.2 R54.1
N$79: C72.1 R54.2 U9.3
N$81: C73.2 R55.2 R56.1
N$83: C74.1 R56.2 U10.3
N$85: C75.2 R57.2 R58.1
N$87: C76.1 R58.2 U10.5
N$89: C77.2 R59.2 R60.1
N$91: C78.1 R60.2 U10.10
N$93: C79.2 R61.2 R62.1
N$95: C80.1 R62.2 U10.12
NRST: C31.1 J2.10 R16.1 S1.3 S1.4 U1.31
OSC32_IN: C27.1 U1.9 X1.P$1
OSC32_OUT: C30.2 U1.10 X1.P$2
OSC_IN: C35.1 U1.29 X2.P3
OSC_OUT: C34.1 U1.30 X2.P2
PA15: D26.P8 J14.5 U1.138
PB4: R63.1 U1.162 U14.27
PB8: D15.P8 J9.12 U1.167
PB9: D15.P7 J9.11 U1.168
PB14: R38.2 U1.94
PB15: D18.P1 J14.14 U1.95
PC6: D17.P2 J14.8 U1.115
PD0: D16.P5 J9.17 U1.142
PD1: D16.P4 J9.15 U1.143
PD3: D16.P3 J9.16 U1.145
PD4: D16.P2 J9.13 U1.146
PD6: D16.P1 J9.14 U1.150
PD7: LED2.C U1.151
PD8: D18.P2 J14.13 U1.96
PD9: D18.P3 J14.16 U1.97
PD10: D18.P4 J14.15 U1.98
PD11: D18.P5 J14.17 U1.99
PD12: D18.P6 J14.18 U1.100
PD13: R12.1 U1.101
PD14: R13.1 U1.104
PD15: R14.1 U1.105
PE0: D15.P6 J9.10 U1.169
PE1: D27.P7 J9.3 U1.170
PE2: D27.P8 J9.4 U1.1
PE3: D15.P1 J9.6 U1.2
PE4: D15.P2 J9.5 U1.3
PE5: D15.P3 J9.8 U1.4
PE6: D15.P4 J9.7 U1.5
PE7: D20.P4 J11.11 U1.68
PE8: D20.P5 J11.13 U1.69
PE9: D20.P6 J11.14 U1.70
PE10: D20.P7 J11.15 U1.73
PE11: D20.P8 J11.16 U1.74
PE12: D26.P1 J11.18 U1.75
PE13: D26.P2 J11.17 U1.76
PE14: D26.P3 J14.4 U1.77
PE15: D26.P5 J14.3 U1.78
PF2: U1.18 U5.5
PF11: D19.P4 J11.5 U1.59
PF12: D19.P6 J11.6 U1.60
PF13: D19.P7 J11.7 U1.63
PF14: D19.P8 J11.8 U1.64
PF15: D20.P1 J11.10 U1.65
PG0: D20.P2 J11.9 U1.66
PG1: D20.P3 J11.12 U1.67
PG2: D18.P7 J21.1 U1.106
PG3: D18.P8 J21.2 U1.107
PG4: D21.P1 J21.4 U1.108
PG5: D21.P2 J21.3 U1.109
PG6: D21.P3 J21.6 U1.110
PG7: D21.P5 J21.5 U1.111
PG8: D17.P8 J14.12 U1.112
PG9: LED3.C U1.152
PG10: LED4.C U1.153
PG11: LED5.C U1.154
PG12: LED6.C U1.155
PG13: LED7.C U1.156
PG14: LED8.C U1.157
PG15: LED9.C U1.160
PH2: D19.P1 J11.3 U1.43
PH3: R17.1 U1.44 U6.9
PH5: D19.P2 J11.4 U1.46
PH6: D26.P7 J14.6 U1.83
PH9: D17.P4 J14.7 U1.86
PH10: D17.P5 J14.9 U1.87
PH11: D17.P6 J14.10 U1.88
PH12: D17.P7 J14.11 U1.89
PH14: D21.P7 J21.8 U1.129
PH15: D21.P8 J21.7 U1.130
PI4: D27.P6 J24.4 U1.173
PI5: D27.P5 J24.3 U1.174
PI6: D27.P4 J24.2 U1.175
PI7: D27.P3 J24.1 U1.176
PI8: D15.P5 J9.9 U1.7
PI11: D16.P7 J9.18 U1.13
SD_DETECT: U1.116 U13.S0
SDIO-PWR: R20.2 U1.121
SDIO-PWR-SWITCHED: C42.1 C43.1 Q1.3 U13.P4
SDIO_CK-SPI3_MOSI: SPI3_MOSI.P$1 U1.141 U6.8 U13.P5
SDIO_CMD: U1.144 U13.P3
SDIO_D0: R8.1 U1.117 U13.P7
SDIO_D1: R9.1 U1.118 U13.P8
SDIO_D2-SPI3_SCK: R10.1 SPI3_SCK.P$1 U1.139 U6.10 U13.P1
SDIO_D3: R11.1 U1.140 U13.P2
SHLD: C36.1 J22.P$1 J22.P$2 J22.P$3 J22.P$4
SPI2_MISO: D24.P3 J8.4 U1.133
SPI2_MOSI: D24.P1 J8.3 U1.134
SPI2_NSS: D24.P8 J8.5 U1.131
SPI2_SCK: D24.P6 J8.6 U1.132
SWDCK: J2.4 U1.137
SWDIO: J2.2 U1.124
SWO: J2.6 U1.161
UART4_RX: D22.P2 J13.4 U1.41
UART4_TX: D22.P1 J13.2 U1.40
ULPI_CK: U1.51 U14.1
ULPI_D0: U1.47 U14.3
ULPI_D1: U1.56 U14.4
ULPI_D2: U1.57 U14.5
ULPI_D3: U1.79 U14.6
ULPI_D4: U1.80 U14.7
ULPI_D5: U1.92 U14.9
ULPI_D6: U1.93 U14.10
ULPI_D7: U1.163 U14.13
ULPI_DIR: U1.34 U14.31
ULPI_NXT: U1.45 U14.2
ULPI_STP: U1.32 U14.29
USB_HS_N: J22.P2 U14.19
USB_HS_P: J22.P3 U14.18
V_USB: C32.1 D4.P$1 J22.P1 R15.1 U1.120 V_USB.P$1
VBATT: C33.P D3.P$2 U1.6
VCC: C1.1 C3.1 C87.1 C89.1 D1.P$2 D4.P$2 D13.P$2 J5.1 J5.2 R67.1 U2.1 U3.1
VEXT-COAX: C40.1 C41.1 D1.P$1 J1.1
VEXT-ECOD: C45.1 C46.1 D13.P$1 J5.5 J5.6
VREF+: C23.1 C24.1 J4.1 R66.1 U1.38